# Altium PCB PCB1.PcbDoc
Units mm, origin at the board's own origin, x right, y up, seen from the top; angles counter-clockwise.
Board outline 100 x 50 mm, 4 copper layers (Top Layer, Layer1, Layer 2, Bottom Layer), stack 1.781 mm thick; 27 components, 17 nets, 80 pads, 0 vias.
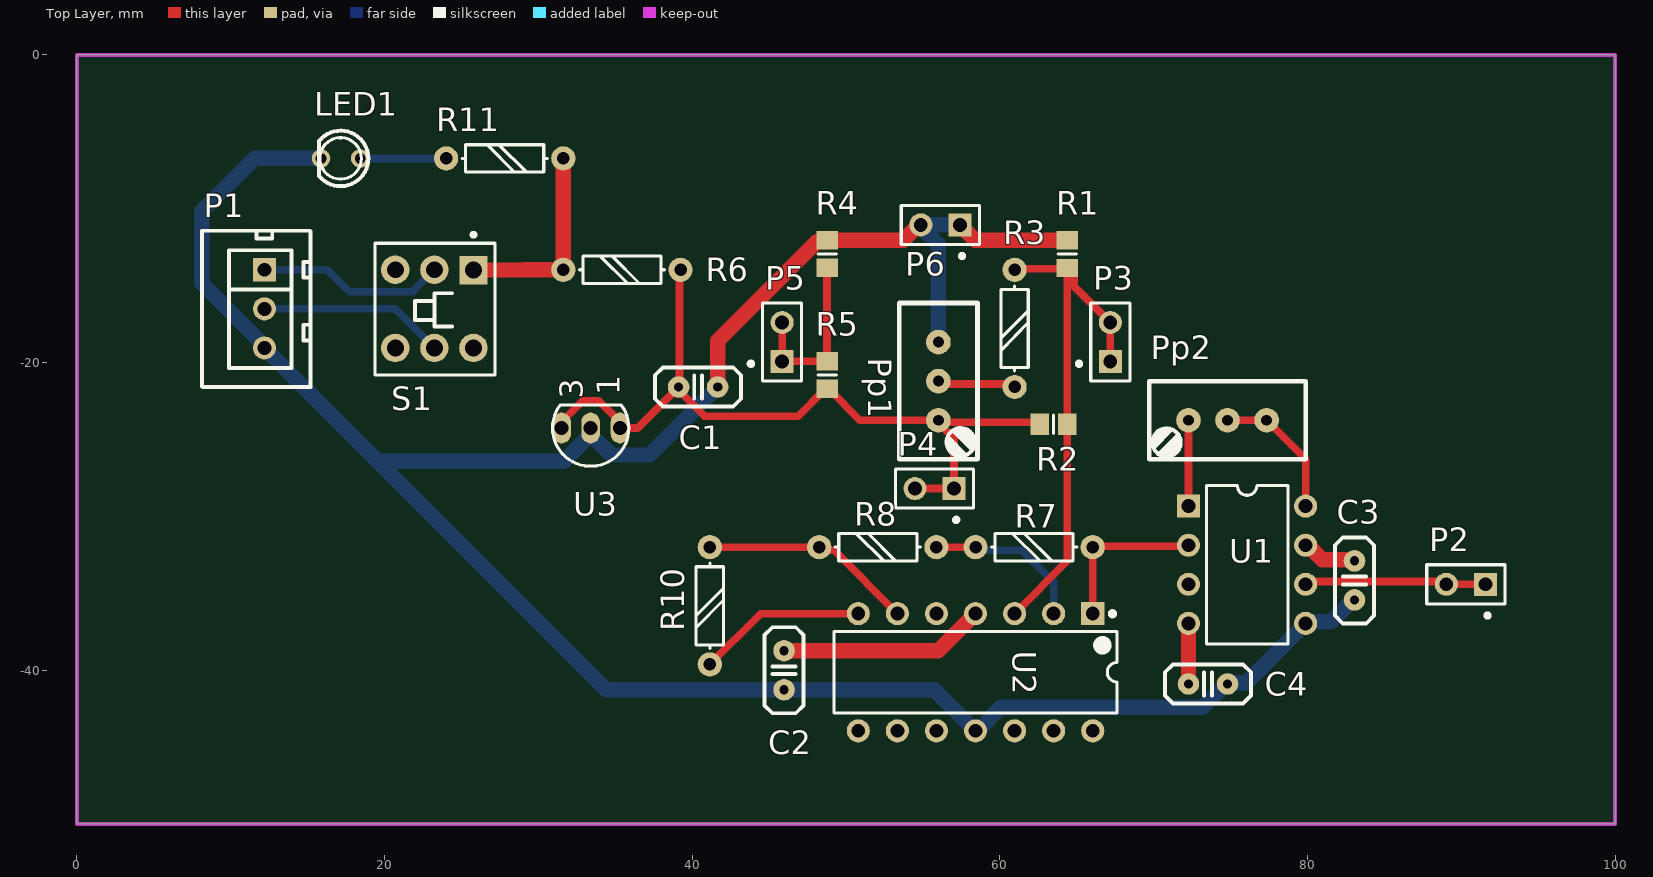
[diagram p0: Top Layer view]
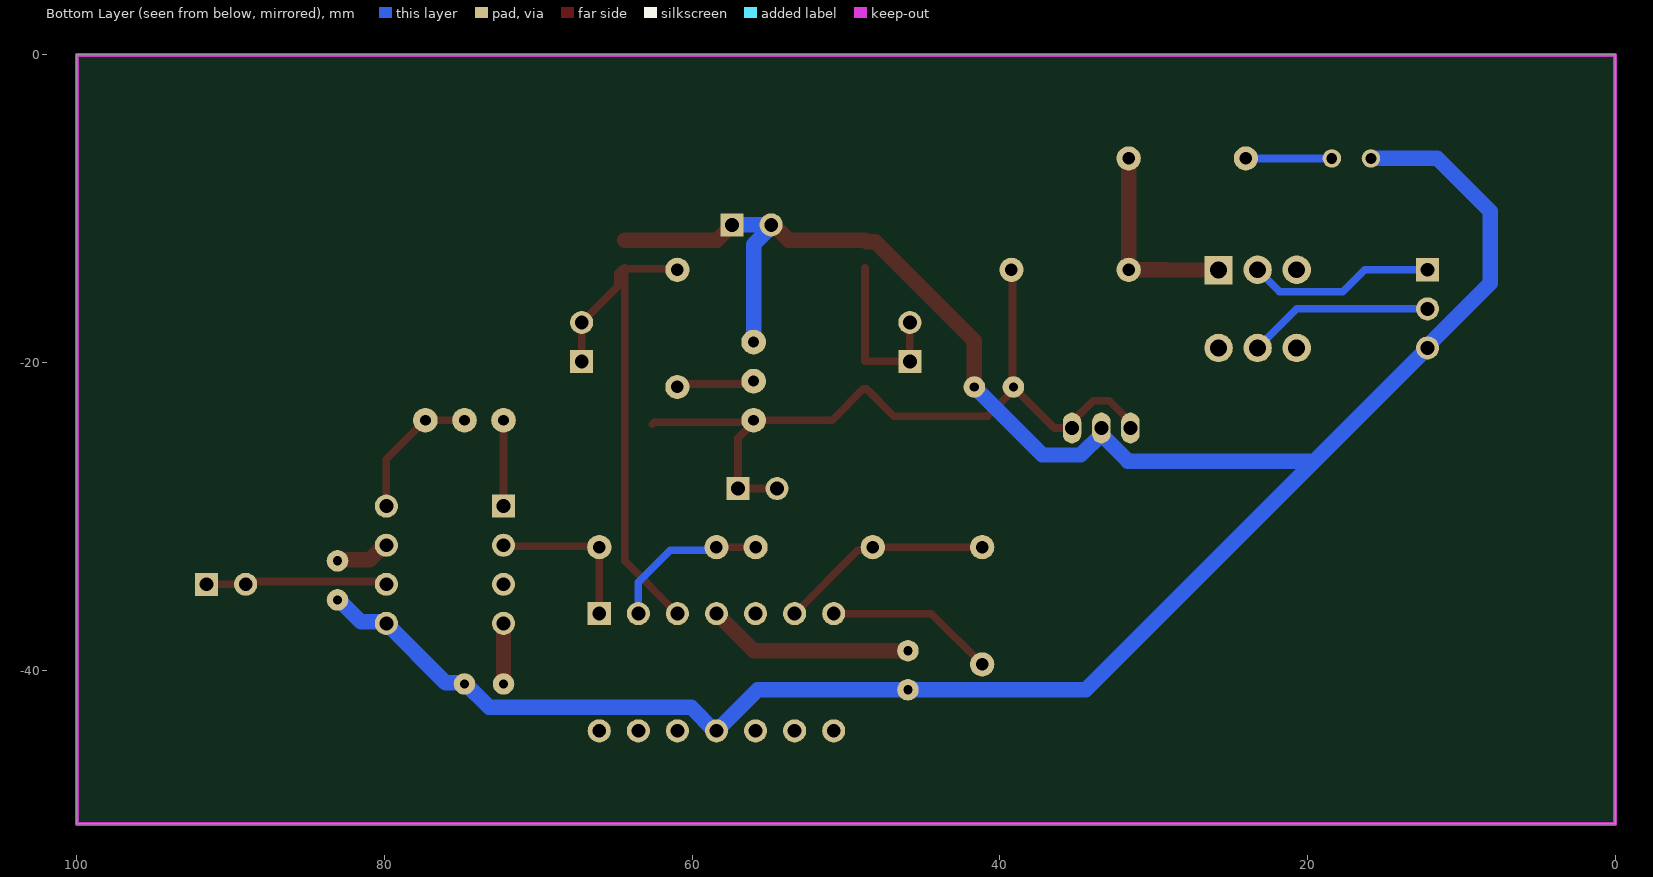
[diagram p1: Bottom Layer view, seen from below]
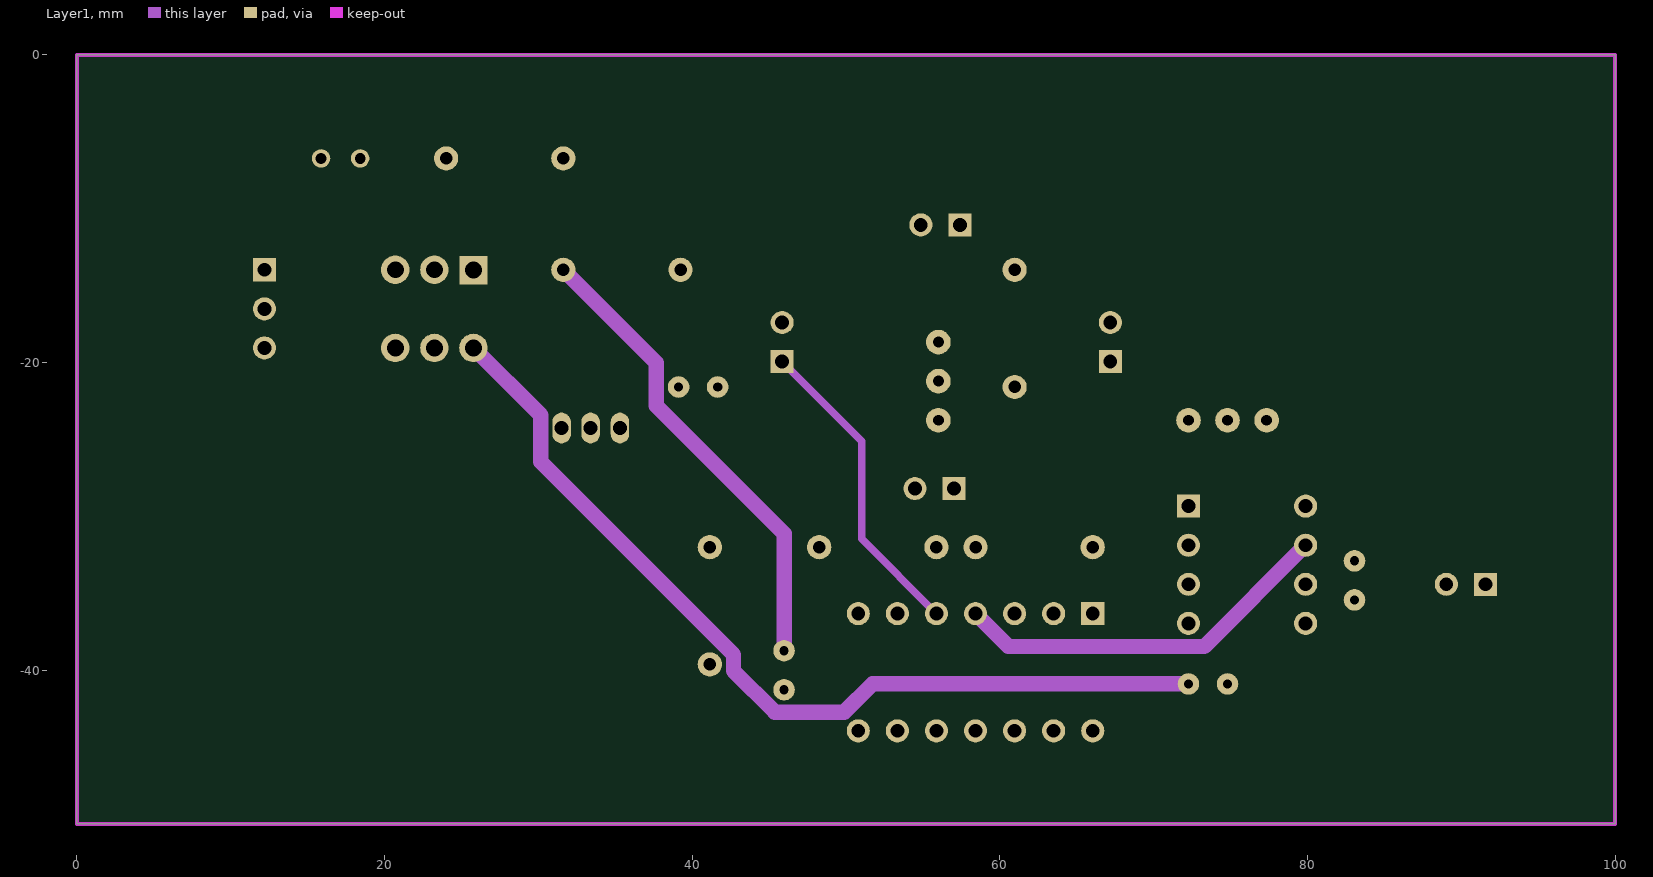
[diagram p2: Layer1]
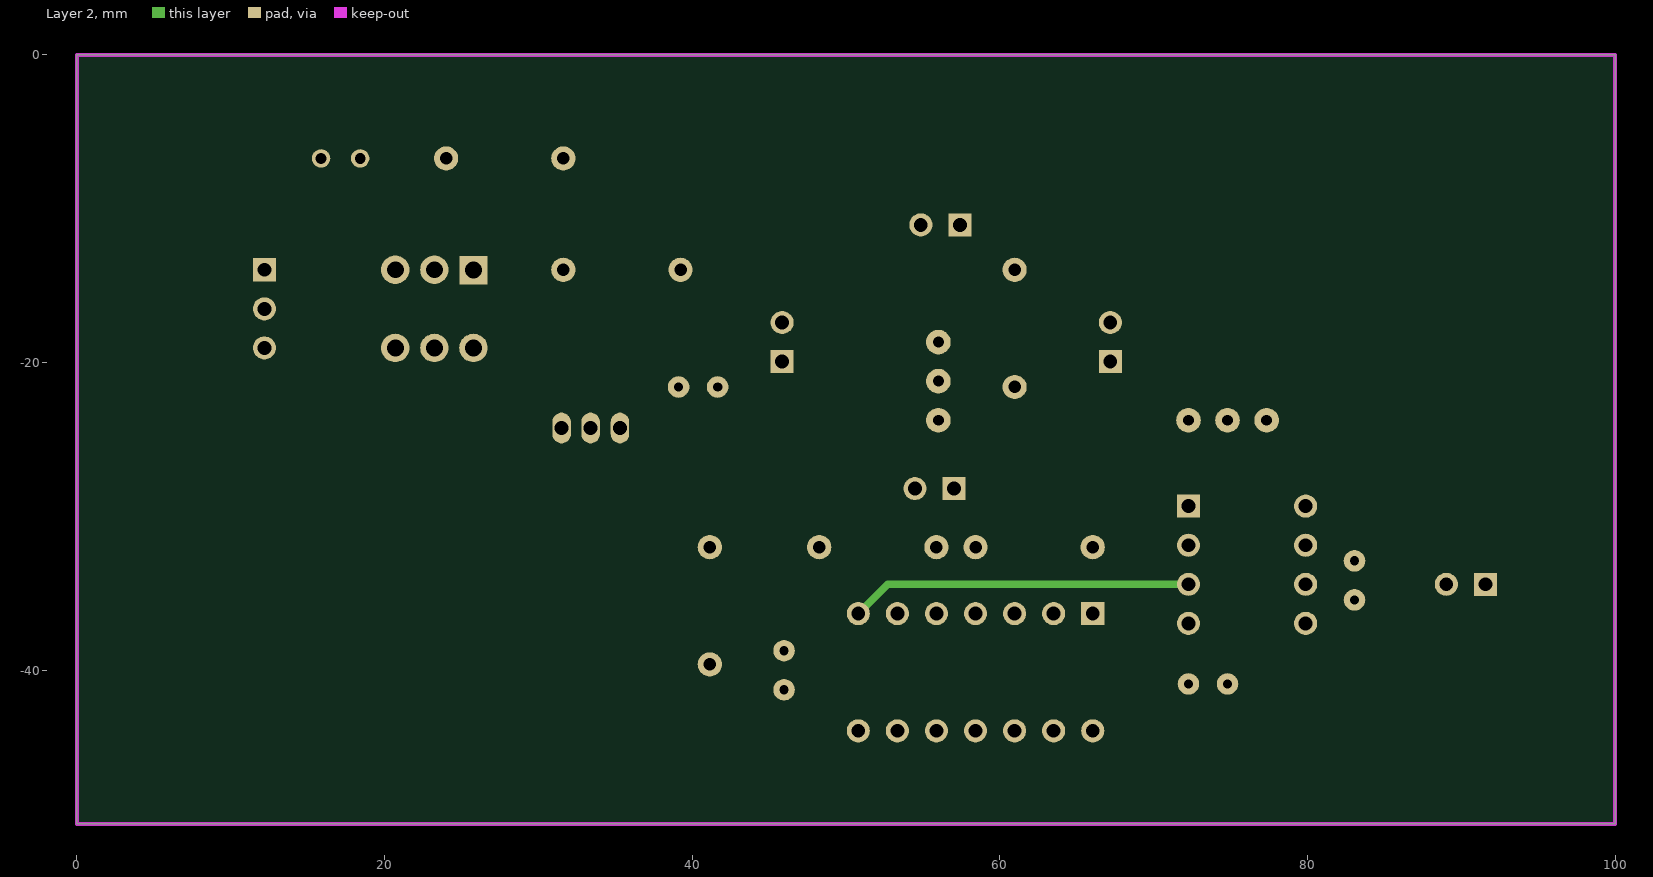
[diagram p3: Layer 2]
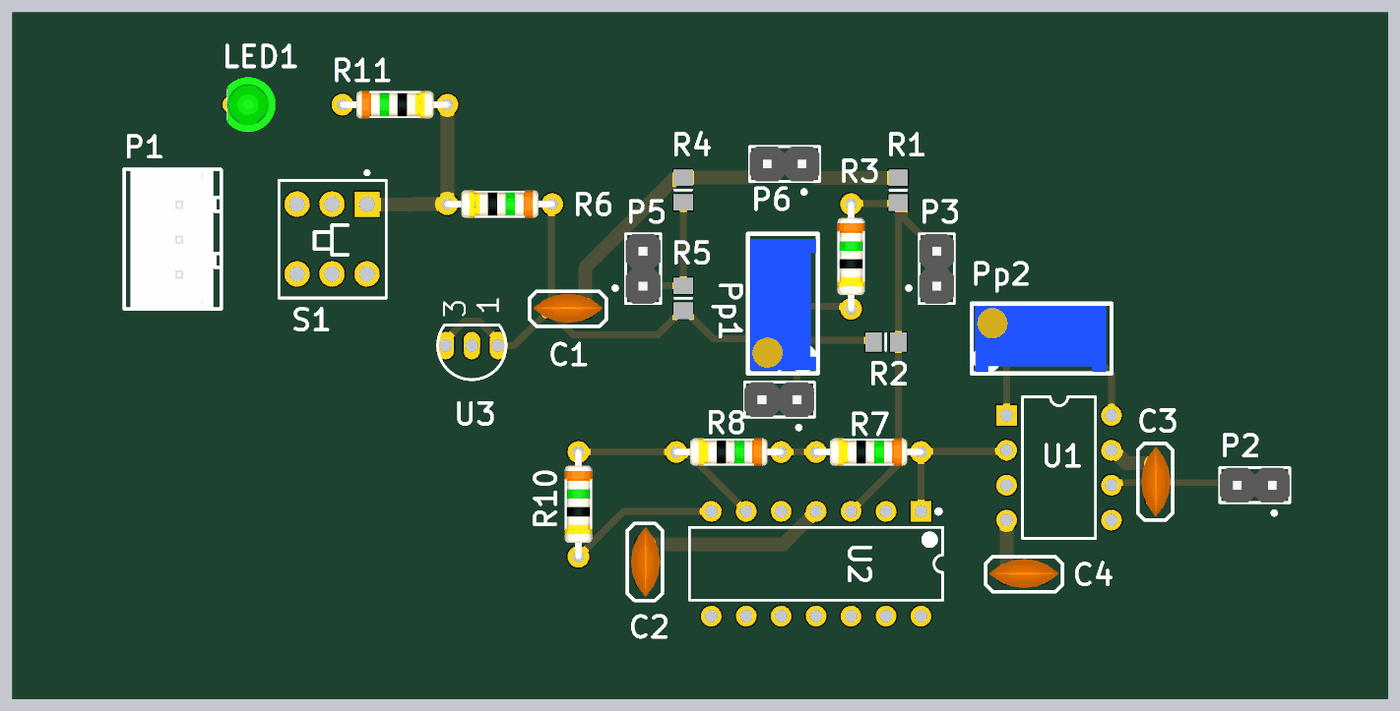
[diagram p4: 3D render of the assembled board from above, using the file's embedded part models]

## Layer stack, top to bottom
Top Solder: solder mask 0.0254, SM-001, Dk 4
Top Layer: signal copper 0.035
Dielectric 2: prepreg 0.0711, PP-006, Dk 4.1
Layer1: signal copper 0.035
Dielectric 1: core 1.4986, Core-043, Dk 4.3
Layer 2: signal copper 0.035
Dielectric 3: prepreg 0.0711, PP-006, Dk 4.1
Bottom Layer: signal copper 0.035
Bottom Solder: solder mask 0.0254, SM-001, Dk 4

## Board outline
0,-50 100,-50 100,0 0,0

## Design rules (kind name [scope] priority, off if disabled: settings)
Clearance [All] p1: gap=0.254 ignorepadtopadclearanceinfootprint=FALSE except(0: Arc-Hole Track-Hole SMDPad-Hole THPad-Hole Via-Hole Fill-Hole Poly-Hole Region-Hole Text-Hole)
PolygonConnect [All] p1: connectstyle=Relief reliefconductorwidth=0.254 reliefentries=4 polygonreliefangle="90 Angle" airgapwidth=0.254
RoutingVias [All] p1: holewidth=0.711 width=1.27 viastyle="Through Hole" minholewidth=0.711 minwidth=1.27 maxholewidth=0.711 maxwidth=1.27
SolderMaskExpansion [All] p1: expansion=0.102 istentingtop=FALSE
Width VCC [InNet('VCC')] p1: maxlimit=1 minlimit=1 preferedwidth=1 minimp=50.000000 maximp=50.000000 favimp=50.000000
Width GND [InNet('GND')] p2: maxlimit=1 minlimit=1 preferedwidth=1 minimp=50.000000 maximp=50.000000 favimp=50.000000
Width -VCC [InNet('-VCC')] p3: maxlimit=1 minlimit=1 preferedwidth=1 minimp=50.000000 maximp=50.000000 favimp=50.000000
Width all [All] p4: maxlimit=0.5 minlimit=0.5 preferedwidth=0.5 minimp=50.000000 maximp=50.000000 favimp=50.000000
30 further rules are at their usual default settings.

## Components (designator, comment, footprint, x,y, rotation, side; value= is the part's Value field where it differs from the comment)
C1 "Cap Nicklon" Capacitor-Disk-Middle 41.656,-21.59 r180 top value=1000nF
C2 "Cap Nicklon" Capacitor-Disk-Middle 45.974,-41.275 r90 top value=100nF
C3 "Cap Nicklon" Capacitor-Disk-Middle 83.058,-35.433 r90 top value=100nF
C4 "Cap Nicklon" Capacitor-Disk-Middle 74.803,-40.894 r180 top value=100nF
LED1 "LED-3-G" LED-R3-H5-SINGLE-G 18.415,-6.731 r180 top
P1 "Header 3" HX2.54-3 12.192,-13.97 r270 top
P2 "Header 2" HDR1X2 91.567,-34.417 r180 top
P3 "Header 2" HDR1X2 67.183,-19.939 r90 top
P4 "Header 2" HDR1X2 57.023,-28.194 r180 top
P5 "Header 2" HDR1X2 45.847,-19.939 r90 top
P6 "Header 2" HDR1X2 57.404,-11.049 r180 top
Pp1 "1k" RP_3296 56.007,-23.749 r180 top
Pp2 "10k" RP_3296 72.263,-23.749 r90 top
R1 "Res Varistor" RESC2012N 64.389,-12.954 r270 top
R2 "Res Varistor" RESC2012N 63.489,-24.003 r180 top
R3 "Resistor" AXIAL-0.3 60.96,-13.97 r270 top value=500
R4 "Res Varistor" RESC2012N 48.768,-12.943 r270 top
R5 "Res Varistor" RESC2012N 48.768,-20.817 r270 top
R6 "Resistor" AXIAL-0.3 39.243,-13.97 r180 top value=1K
R7 "Resistor" AXIAL-0.3 66.04,-32.004 r180 top value=10k
R8 "Resistor" AXIAL-0.3 55.88,-32.004 r180 top value=1k
R10 "Resistor" AXIAL-0.3 41.148,-32.004 r270 top value=10k
R11 "Resistor" AXIAL-0.3 24.003,-6.731 r0 top value=500
S1 "自锁开关" sw_8.5mm 23.241,-13.97 r270 top
U1 "AD620AN" N-8 76.073,-33.147 r270 top
U2 "LM324" DIP-14 58.42,-40.132 r270 top
U3 "TL431" BCY-W3/E4 33.401,-24.257 r90 top

## Footprints (in the part's own frame and the unit in brackets; to place one, negate y for a bottom-side part, rotate by r counter-clockwise, add the part's x,y. Pads: shape width x height; smd on the part's side, far side on the other; paste and mask are expansions set on the pad)
AXIAL-0.3 [mil] "1/8W电阻"
  round 62 hole 32: 1(0,0) 2(300,0)
  silkscreen extent 41,-35 259,35, body extent -10,-39 310,39, height 89
BCY-W3/E4 [mm] "TO, Flat Index; 3 In-Line, Axial Leads; Body Dia. 4.5mm; Leads 0.51 x 0.48 mm (max)"
  oval 2x1.2 hole 0.9: 1(0,-1.905) 2(0,0) 3(-0.002,1.888)
  silkscreen extent -2.48,-2.48 1.5,2.48, body extent -2.48,-2.5 1.5,2.5, height 7
Capacitor-Disk-Middle [mm]
  round 1.4 hole 0.6: 1(0,0) 2(2.54,0)
  silkscreen extent -1.52,-1.27 4.06,1.27, body extent -1.23,-1.1 3.77,1, height 7
DIP-14 [mm]
  rect 1.5x1.5 hole 0.9: 1(-3.81,7.62)
  round 1.5 hole 0.9: 2(-3.81,5.08) 3(-3.81,2.54) 4(-3.81,0) 5(-3.81,-2.54) 6(-3.81,-5.08) 7(-3.81,-7.62) 8(3.81,-7.62) 9(3.81,-5.08) 10(3.81,-2.54) 11(3.81,0) 12(3.81,2.54) 13(3.81,5.08) 14(3.81,7.62)
  silkscreen extent -3.95,-9.2 2.65,9.2
HDR1X2 [mm] "Connector; Header; 2 Position"
  rect 1.5x1.5 hole 0.9: 1(0,0)
  round 1.5 hole 0.9: 2(2.54,0)
  silkscreen extent -1.27,-1.27 3.81,2.17, body extent -1.27,-1.27 3.81,1.27, height 8.54
HX2.54-3 [mm]
  rect 1.5x1.5 hole 0.9: 1(0,0)
  round 1.5 hole 0.9: 2(2.54,0) 3(5.08,0)
  silkscreen extent -2.54,-4.06 7.63,3, body extent -2.41,-3.58 7.59,2.42, height 7
LED-R3-H5-SINGLE-G [mm]
  round 1.2 hole 0.7: 1(0,0) 2(2.54,0)
  silkscreen extent -0.53,-1.8 2.68,1.8, body extent -0.73,-2 2.79,2, height 5.2
N-8 [mm] "DIP; 8 Leads; Row Spacing 7.62 mm; Pitch 2.54 mm"
  rect 1.5x1.5 hole 0.9: 1(-3.81,-3.81)
  round 1.5 hole 0.9: 2(-1.27,-3.81) 3(1.27,-3.81) 4(3.81,-3.81) 5(3.81,3.81) 6(1.27,3.81) 7(-1.27,3.81) 8(-3.81,3.81)
  silkscreen extent -5.15,-2.65 5.15,2.65
RESC2012N [mm] "Chip Resistor, Body 2.0x1.2mm, IPC Medium Density"
  rect 1.2x1.4 smd: 1(-0.9,0) 2(0.9,0)
  silkscreen extent 0,-0.6 0,0.6, body extent -1.07,-0.7 1.07,0.7, height 0.7
RP_3296 [mm] "电位器"
  round 1.6 hole 0.7: 1(0,0) 2(0,-2.54) 3(0,-5.08)
  silkscreen extent -2.54,-7.62 2.54,2.54, body extent -2.41,-7.23 2.39,2.3, height 11.55
sw_8.5mm [mm] "自锁开关"
  round 1.85 hole 1.1: 1(0,0) 2(0,-2.54) 4(5.08,0) 5(5.08,2.54) 6(5.08,-2.54)
  rect 1.85x1.85 hole 1.1: 3(0.016,2.544)
  silkscreen extent -2.4,-3.86 6.84,3.94, body extent -0.83,-3.49 6.17,3.51, height 12.5

## Part data
C1 C2 C3 C4: "CBB聚乙烯薄膜电容", Voltage=63V, Published=8-Jun-2000, Publisher="Altium Limited", Revision="July-2002: Re-released for DXP Platform.", 实物样品照片=https://item.taobao.com/item.htm?spm=a230r.1.14.32.21fd24b7VWml4d&id=37914290992&ns=1&abbucket=13#detail
LED1: "Typical INFRARED GaAs LED", Published=8-Jun-2000, Publisher="Altium Limited", Revision="July-2002: Re-released for DXP Platform."
P1: "Header, 3-Pin", LatestRevisionDate=17-Jul-2002, LatestRevisionNote="Re-released for DXP Platform.", Publisher="Altium Limited"
P2 P3 P4 P5 P6: "Header, 2-Pin", LatestRevisionDate=17-Jul-2002, LatestRevisionNote="Re-released for DXP Platform.", Publisher="Altium Limited"
Pp1 Pp2: library part RP_3296, "3296电位器", 购买链接=https://item.taobao.com/item.htm?spm=a230r.1.14.90.21641e34zQj3ul&id=19303265869&ns=1&abbucket=13#detail
R1 R2 R4 R5: "贴片压敏电阻", Code_IPC=RESC2012, LatestRevisionDate=29-May-2009, LatestRevisionNote="IPC-7351 Footprint Added.", PackageDescription="Chip Resistor 0805 Case Size", PackageReference=6-0805, PackageVersion=Mar-2003, Published=24-Mar-1999, Publisher="Altium Limited"
S1: library part "SW DPDT"
U1: "Low-Cost, Low-Power Instrumentation Amplifier", ComponentLink1Description="Manufacturer Link", ComponentLink1URL=http://www.analog.com/en/prod/0%2C2877%2CAD620%2C00.html, ComponentLink2Description=Datasheet, ComponentLink2URL=http://www.analog.com/UploadedFiles/Data_Sheets/897653854AD620_g.pdf, DatasheetVersion="REV.D 1998", LatestRevisionDate=04-Mar-2005, LatestRevisionNote="Stylized 3D Model Added.", PackageDescription="DIP; 8 Leads; Row Spacing 7.62 mm; Pitch 2.54 mm", PackageReference=N-8, PackageVersion=revA, Published=8-Jun-2000, Publisher="Altium Limited"
R3 R6 R7 R8 R10 R11: Published=8-Jun-2000, Publisher="Altium Limited", Revision="July-2002: Re-released for DXP Platform."

## Nets (pads, with @x,y where several pads share a name; then routed paths per layer and width w, separated by ;. In a path a pad name is that pad's centre, name@x,y a point inside that pad or via, vN(x,y) a via of type N, cw(c..) or ccw(c..) an arc to the next point about the centre after c; other vN are vias at no path point)
2.5V: C1.2 P4.1 P4.2 Pp1.1 R2.2 R5.2 R6.1 U3.1 U3.3 | length 51.8
  Top Layer w0.5: U3.3 31.513,-23.859 32.893,-22.479 33.928,-22.479 35.306,-23.857 U3.1 36.449,-24.257 C1.2 ; R6.1 39.179,-14.034 39.179,-21.526 C1.2 ; P4.2 P4.1 57.023,-24.925 56.007,-23.909 Pp1.1 ; R2.2 62.462,-23.876 56.134,-23.876 Pp1.1 ; C1.2 39.116,-21.805 40.806,-23.495 46.89,-23.495 48.668,-21.717 R5.2 48.868,-21.717 50.9,-23.749 Pp1.1
-VCC: C4.2 S1.5 U1.4 | length 63.4
  Top Layer w1: C4.2 U1.4
  Layer1 w1: S1.5 30.159,-23.428 30.159,-26.455 42.689,-38.986 42.689,-40.047 45.372,-42.729 49.886,-42.729 51.721,-40.894 C4.2
GND: C1.1 C2.1 C3.1 C4.1 LED1.2 P1.3 P6.1 P6.2 Pp1.3 R1.1 R4.1 U1.5 U2.11 U3.2 | length 167.4
  Top Layer w1: C1.1 41.656,-18.589 48.102,-12.143 48.668,-12.143 R4.1 53.735,-12.043 54.729,-11.049 P6.2 ; P6.1 58.409,-12.054 R1.1
  Bottom Layer w1: LED1.2 11.557,-6.731 8.128,-10.16 8.128,-14.851 12.192,-18.915 P1.3 19.558,-26.416 ; U3.2 U3.2@33.401,-24.667 ; C1.1 37.235,-26.011 34.745,-26.011 U3.2@33.401,-24.667 ; Pp1.3 56.007,-12.327 54.864,-11.184 P6.2 P6.1 ; C3.1 82.95,-35.433 81.521,-36.861 79.979,-36.861 U1.5 76.023,-40.817 74.88,-40.817 C4.1 74.721,-40.894 73.206,-42.408 60.068,-42.408 58.535,-43.942 U2.11 55.753,-41.275 C2.1 34.417,-41.275 19.558,-26.416 ; 19.558,-26.416 31.671,-26.416 33.401,-24.686 U3.2@33.401,-24.667
NetLED1_1: LED1.1 R11.1 | length 5.6
  Bottom Layer w0.5: LED1.1 R11.1
NetP1_1: P1.1 S1.1 | length 12.2
  Bottom Layer w0.5: P1.1 16.278,-13.97 17.707,-15.399 21.812,-15.399 S1.1
NetP1_2: P1.2 S1.4 | length 12.1
  Bottom Layer w0.5: P1.2 20.701,-16.51 S1.4
NetP2_1: P2.1 P2.2 U1.6 | length 11.8
  Top Layer w0.5: U1.6 80.071,-34.229 88.839,-34.229 P2.2 P2.1
NetPp1_2: Pp1.2 R3.2 | length 5.1
  Top Layer w0.5: Pp1.2 56.197,-21.399 60.77,-21.399 R3.2
NetPp2_1: Pp2.1 U1.1 | length 5.6
  Top Layer w0.5: U1.1 Pp2.1
NetPp2_2: Pp2.2 Pp2.3 U1.8 | length 9.2
  Top Layer w0.5: Pp2.2 Pp2.3 79.883,-26.289 U1.8
NetR7_1: R7.1 U1.2 U2.1 | length 10.6
  Top Layer w0.5: U2.1 R7.1 66.103,-31.941 72.2,-31.941 U1.2
NetR7_2: R7.2 R8.1 U2.2 | length 10.6
  Top Layer w0.5: R8.1 R7.2
  Bottom Layer w0.5: R7.2 58.626,-32.21 61.42,-32.21 63.5,-34.29 U2.2
NetR8_2: R8.2 R10.1 U2.6 | length 14
  Top Layer w0.5: R10.1 R8.2 48.466,-32.21 49.228,-32.21 U2.6
NetR10_2: R10.2 U1.3 U2.7 | length 33.3
  Top Layer w0.5: R10.2 44.45,-36.322 U2.7
  Layer 2 w0.5: U2.7 52.705,-34.417 U1.3
U1: P3.1 P3.2 R1.2 R2.1 R3.1 U2.3 | length 34.6
  Top Layer w0.5: U2.3 64.389,-32.893 R2.1 R1.2@64.389,-13.912 ; R3.1 61.018,-13.912 R1.2@64.389,-13.912 ; R1.2 R1.2@64.389,-13.912 ; P3.1 P3.2 64.839,-15.055 64.839,-14.204 64.547,-13.912 R1.2@64.389,-13.912
U2: P5.1 P5.2 R4.2 R5.1 U2.5 | length 32.1
  Top Layer w0.5: P5.2 P5.1 45.869,-19.917 R5.1 R4.2
  Layer1 w0.5: P5.1 51.018,-25.11 51.018,-31.46 U2.5
VCC: C2.2 C3.2 R6.2 R11.2 S1.3 U1.7 U2.4 | length 85.9
  Top Layer w1: S1.3 29.067,-13.986 29.083,-13.97 R6.2 R11.2 ; C2.2 56.007,-38.735 U2.4 ; U1.7 80.018,-31.877 80.958,-32.816 82.981,-32.816 C3.2
  Layer1 w1: R6.2 37.662,-20.009 37.662,-22.803 45.974,-31.115 C2.2 ; U2.4 60.559,-38.461 73.299,-38.461 U1.7
pads on no net: S1.2 S1.6 U2.8 U2.9 U2.10 U2.12 U2.13 U2.14

## Keep-outs
Keep-Out Layer:
  the board outline again, w0.254

## Text inside footprints (layer, text, board x,y; h text height)
U3: Top Overlay "1" at 35.301,-22.13 h1.5 r90; Top Overlay "3" at 32.891,-22.36 h1.5 r90